# Altium PCB MainboardPCB.PcbDoc (part 2 of 2)
Units mm, origin at the board's own origin, x right, y up, seen from the top; angles counter-clockwise.
Board outline 134.24 x 134.24 mm, 2 copper layers (Top Layer, Bottom Layer); 101 components, 150 nets, 492 pads, 247 vias.
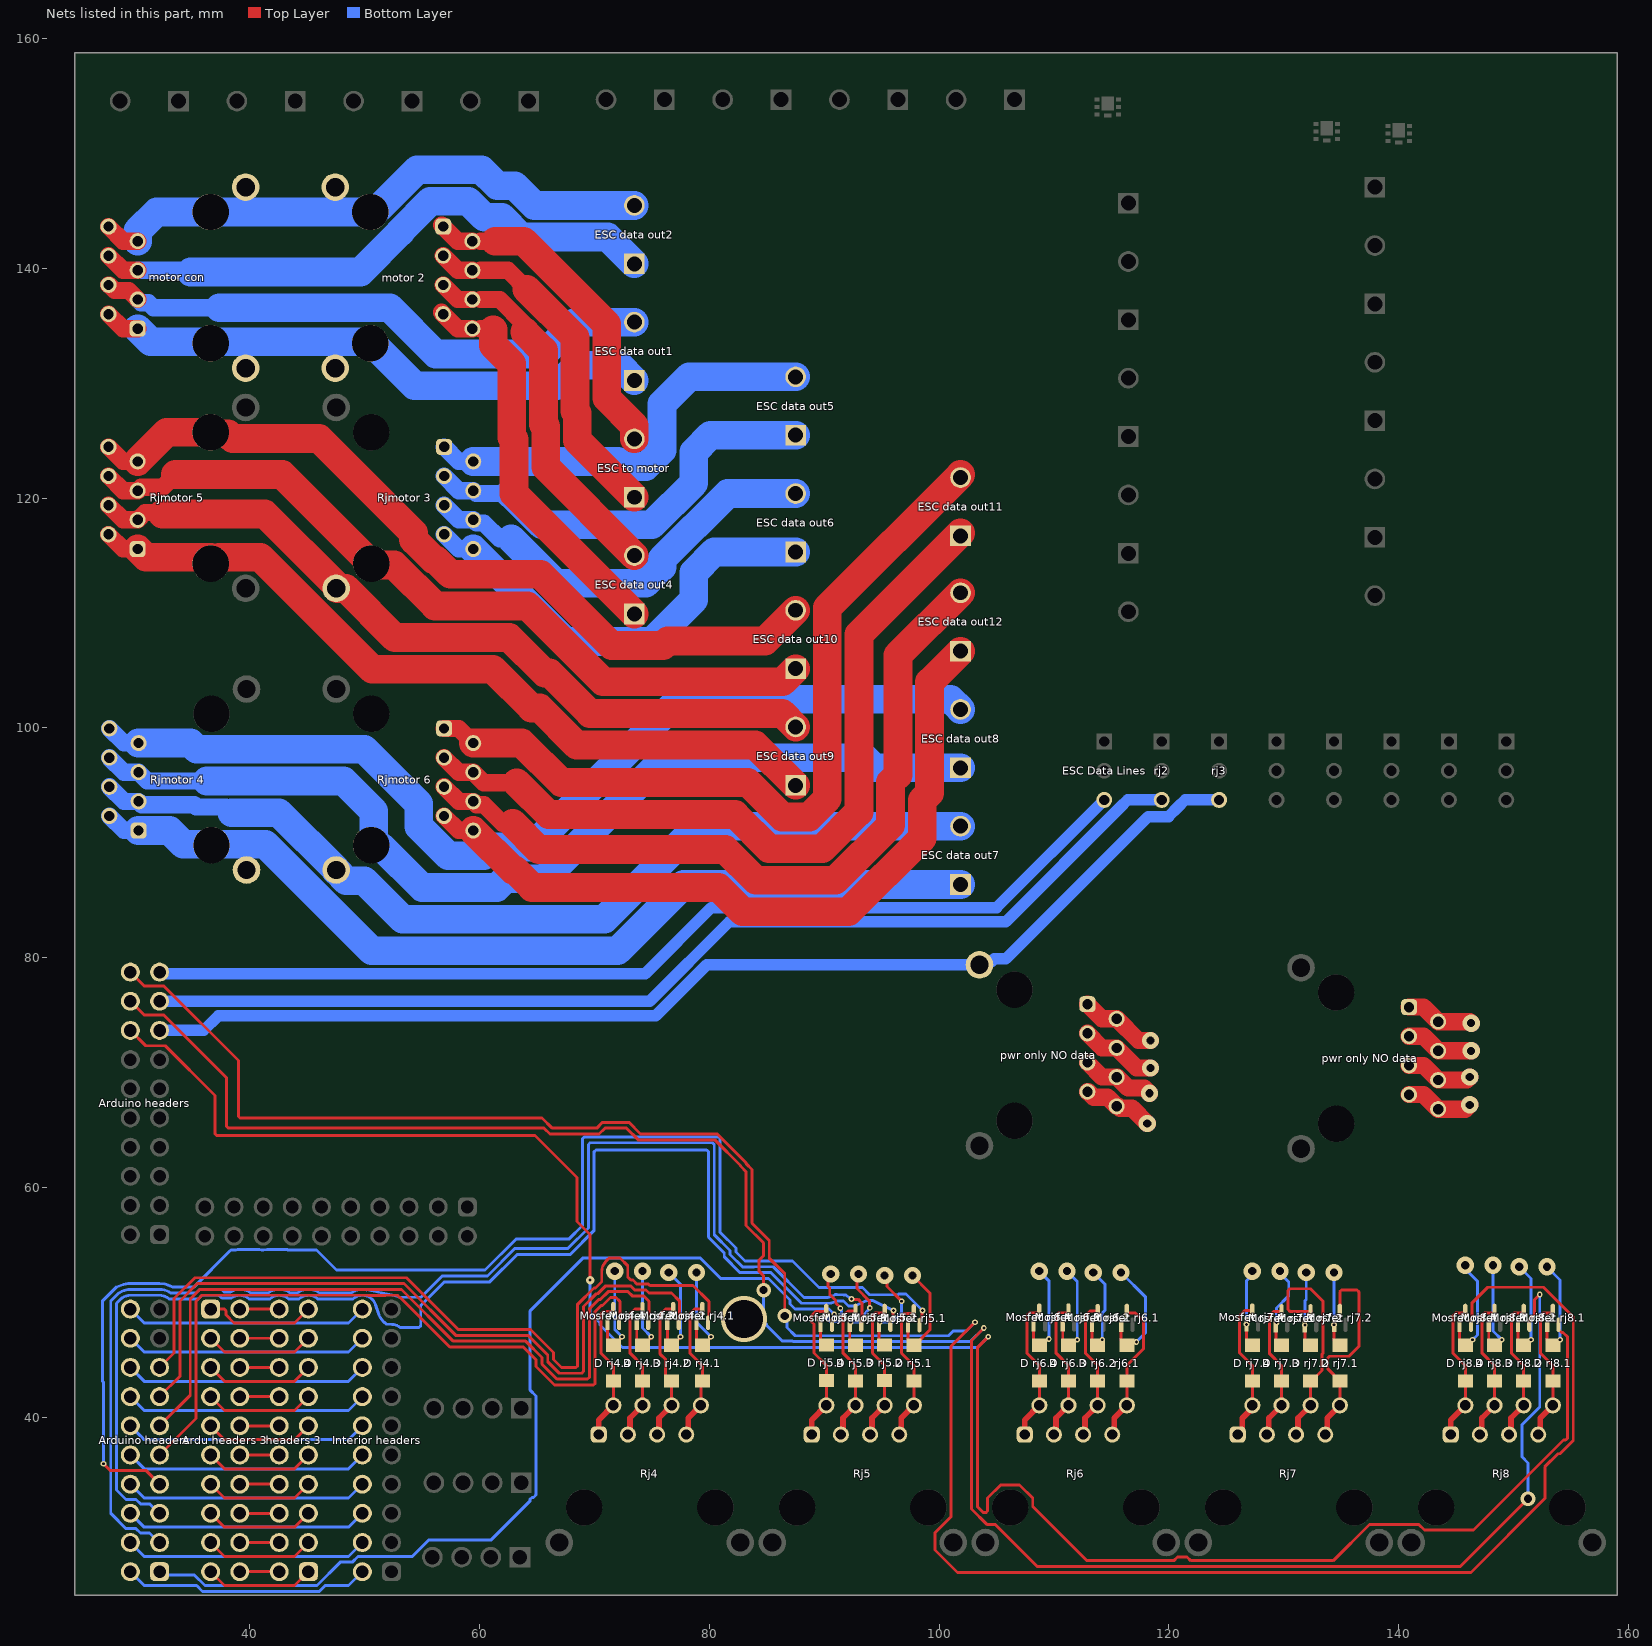
[diagram p2: the nets of this part, all layers, seen from the top]

## Via types
v1: diameter 1.5, hole 0.711, Top Layer to Bottom Layer, 143 vias
v2: diameter 1.27, hole 0.711, Top Layer to Bottom Layer, 42 vias
v3: diameter 0.5, hole 0.25, Top Layer to Bottom Layer, 41 vias
v4: diameter 0.75, hole 0.25, Top Layer to Bottom Layer, 8 vias
v5: diameter 1, hole 0, Top Layer to Bottom Layer, 5 vias
v6: diameter 4, hole 3.3, Top Layer to Bottom Layer, 4 vias
v7: diameter 1.27, hole 0, Top Layer to Bottom Layer, 3 vias
v8: diameter 0.75, hole 0.5, Top Layer to Bottom Layer, 1 vias

## Nets (pads, with @x,y where several pads share a name; then routed paths per layer and width w, separated by ;. In a path a pad name is that pad's centre, name@x,y a point inside that pad or via, vN(x,y) a via of type N, cw(c..) or ccw(c..) an arc to the next point about the centre after c; other vN are vias at no path point) (continued)
"NetArdu headers 1_15": "Arduino headers.15"@32.131,73.66 "pwr only NO data.Shell"@103.505,79.375 rj3.3 | length 100.6
  Bottom Layer w1: 32.131,73.66 35.964,73.66 37.25,74.946 75.322,74.946 79.751,79.375 103.505,79.375 103.773,79.643 104.551,79.643 104.791,79.883 105.791,79.883 118.185,92.277 119.965,92.277 120.813,93.126 120.813,93.14 121.399,93.726 rj3.3@124.365,93.726
"NetArdu headers 1_16": "Arduino headers.16"@29.591,73.66 "Mosfet rj8.1.2" | length 181.7
  Top Layer w0.254: 29.591,73.66 30.925,72.326 32.631,72.326 36.957,68 36.957,64.665 37.106,64.516 64.806,64.516 68.465,60.857 68.465,57.026 69.605,55.886 v4(69.605,51.921) ; v3(104.267,46.99) 103.314,46.037 103.314,32.212 103.848,31.678 104.058,31.678 104.207,31.827 104.207,32.947 105.359,34.099 106.987,34.099 108.139,32.947 108.139,32.229 112.866,27.502 120.418,27.502 120.737,27.821 121.578,27.821 121.899,27.5 134.293,27.5 137.455,30.662 141.751,30.662 142.248,30.165 146.497,30.165 154.345,38.013 154.533,38.013 154.682,38.162 154.682,46.997 154.312,47.367 154.182,47.367 153.916,47.633 153.916,48.04
  Bottom Layer w0.254: v4(69.605,51.921) 69.605,49.058 70.476,48.187 70.476,48.012 72.424,46.064 103.341,46.064 v3(104.267,46.99)
"NetArdu headers 1_17": "Arduino headers.17"@32.131,76.2 rj2.3 | length 94.5
  Bottom Layer w1: 32.131,76.2 74.803,76.2 81.705,83.102 105.789,83.102 115.814,93.126 115.814,93.14 116.399,93.726 rj2.3@119.365,93.726
"NetArdu headers 1_18": "Arduino headers.18"@29.591,76.2 "Mosfet rj8.2.2" | length 187.9
  Top Layer w0.254: 29.591,76.2 30.797,74.994 32.503,74.994 37.973,69.524 37.973,65.3 38.122,65.151 65.6,65.151 66.108,64.643 70.394,64.643 70.902,65.151 72.775,65.151 73.791,64.135 80.466,64.135 82.689,61.912 82.689,61.853 83.185,61.357 83.185,56.686 84.697,55.174 84.697,54.046 84.328,53.677 84.328,52.694 84.709,52.313 v2(84.709,51.054) ; v3(103.886,47.752) 102.806,46.672 102.806,32.001 104.143,30.664 104.862,30.664 108.532,26.994 121.687,26.994 121.689,26.992 145.356,26.992 v2(151.257,32.893) ; 151.376,48.04 151.376,48.481 151.813,48.918 151.813,50.213 v3(152.273,50.673)
  Bottom Layer w0.254: v2(84.709,51.054) 84.693,51.038 84.693,48.342 84.987,48.049 84.987,47.982 86.357,46.612 87.222,46.612 87.262,46.572 102.706,46.572 v3(103.886,47.752) ; v2(151.257,32.893) 151.257,36.013 150.749,36.521 150.749,39.365 152.273,40.889 v3(152.273,50.673)
  other v6: 82.996,48.535
"NetArdu headers 1_19": "Arduino headers.19"@32.131,78.74 "ESC Data Lines.3" | length 88.6
  Bottom Layer w1: 32.131,78.74 32.255,78.616 32.715,78.616 32.742,78.589 74.398,78.589 80.165,84.356 104.995,84.356 114.365,93.726
"NetArdu headers 1_20": "Arduino headers.20"@29.591,78.74 "Mosfet rj8.4.2" | length 203.8
  Top Layer w0.254: 29.591,78.74 30.797,77.534 32.503,77.534 38.989,71.048 38.989,66.189 39.138,66.04 65.429,66.04 66.318,65.151 70.184,65.151 70.692,65.659 72.985,65.659 74.001,64.643 80.677,64.643 83.197,62.123 83.197,62.063 83.705,61.555 83.705,56.884 85.205,55.384 85.205,53.836 86.55,52.491 v2(86.55,48.815) ; v3(103.124,48.26) 101.027,46.163 101.027,31.319 99.64,29.932 99.64,28.428 101.584,26.484 146.285,26.484 152.72,32.919 152.72,35.67 153.861,36.81 154.049,36.81 155.19,37.951 155.19,48.713 152.599,51.304 147.751,51.304 146.365,49.918 146.365,48.583 146.296,48.514 146.296,48.04
  Bottom Layer w0.254: v2(86.55,48.815) 86.745,48.621 86.745,47.808 87.473,47.08 100.801,47.08 101.219,47.498 102.362,47.498 v3(103.124,48.26)
"NetArdu headers 2_1": "Arduino headers.1"@32.131,26.543 "Mosfet rj5.4.2" | length 84.5
  Top Layer w0.254: 90.67,48.04 90.67,48.514 90.815,48.659 90.815,48.891 v3(90.862,48.939)
  Bottom Layer w0.254: 32.131,26.543 32.416,26.258 35.156,26.258 36.076,25.337 45.826,25.337 47.858,27.369 48.904,27.369 49.412,27.877 54.132,27.877 55.54,29.285 60.96,29.285 64.389,32.713 64.389,32.86 64.538,33.009 64.685,33.009 64.908,33.232 64.908,41.825 64.389,42.344 64.389,49.254 68.971,53.836 79.208,53.836 80.978,52.066 84.284,52.066 84.288,52.07 85.13,52.07 87.017,50.183 87.017,49.841 87.455,49.403 90.397,49.403 v3(90.862,48.939)
"NetArdu headers 2_2": "Arduino headers.2"@29.591,26.543 "Interior headers.2" | length 21.6
  Bottom Layer w0.254: 29.591,26.543 30.797,25.337 35.358,25.337 35.866,24.829 46.037,24.829 46.545,25.337 48.578,25.337 49.784,26.543
"NetArdu headers 2_3": "Arduino headers.3"@32.131,29.083 "Mosfet rj5.3.2" | length 112.8
  Top Layer w0.254: v3(92.361,50.29) 92.4,50.251 92.946,50.251 93.279,49.918 93.279,48.583 93.21,48.514 93.21,48.04
  Bottom Layer w0.254: 32.131,29.083 32.077,29.083 31.251,29.909 30.471,29.909 30.091,30.289 29.219,30.289 27.877,31.631 27.877,50.113 28.526,50.762 28.705,50.87 cw(c29.591,49.403) 29.591,51.117 32.131,51.117 cw(c32.131,49.403) 33.124,50.8 35.307,50.8 35.624,51.117 37.528,51.117 37.758,50.887 38.258,50.887 cw(c39.116,49.403) 40.109,50.8 41.552,50.8 cw(c42.545,49.403) 43.538,50.8 44.092,50.8 cw(c45.085,49.403) 46.078,50.8 48.791,50.8 cw(c49.784,49.403) 50.127,51.082 52.565,50.585 cw(c52.324,49.403) 52.748,50.532 53.017,50.431 54.876,50.431 56.73,52.285 60.666,52.285 63.076,54.695 67.681,54.695 69.457,56.471 69.457,63.732 69.606,63.881 80.266,63.881 80.415,63.732 80.415,55.876 81.792,54.499 81.792,54.161 82.871,53.082 83.863,53.082 83.867,53.086 85.551,53.086 88.218,50.419 90.316,50.419 90.413,50.438 90.942,50.657 91.097,50.657 91.657,50.624 91.866,50.611 v3(92.361,50.29)
"NetArdu headers 2_4": "Arduino headers.4"@29.591,29.083 "Interior headers.4" | length 21.2
  Bottom Layer w0.254: 29.591,29.083 30.797,27.877 48.578,27.877 49.784,29.083
"NetArdu headers 2_5": "Arduino headers.5"@32.131,31.623 "Mosfet rj5.2.2" | length 114.4
  Top Layer w0.254: 95.75,48.04 95.75,48.514 95.965,48.729 95.965,49.229 v3(96.012,49.276)
  Bottom Layer w0.254: 32.131,31.623 32.077,31.623 31.251,32.449 30.471,32.449 30.091,32.829 29.219,32.829 28.385,33.663 28.385,49.797 28.385,49.903 28.737,50.254 cw(c29.591,49.403) 29.591,50.609 32.131,50.609 cw(c32.131,49.403) 32.946,50.292 35.518,50.292 35.835,50.609 37.317,50.609 37.547,50.379 38.258,50.379 38.407,50.379 cw(c39.116,49.403) 39.931,50.292 41.73,50.292 cw(c42.545,49.403) 43.36,50.292 44.27,50.292 cw(c45.085,49.403) 45.835,50.347 cw(c45.085,49.403) 45.9,50.292 48.791,50.292 48.969,50.292 cw(c49.784,49.403) 50.929,49.781 51.179,49.025 ccw(c52.895,49.592) 51.899,48.083 52.362,48.068 cw(c52.324,46.863) 53.079,47.804 54.72,47.804 54.869,47.952 54.869,49.705 56.94,51.777 60.876,51.777 63.241,54.142 67.846,54.142 69.965,56.261 69.965,63.097 70.114,63.246 79.758,63.246 79.907,63.097 79.907,55.665 81.284,54.289 81.284,53.951 82.661,52.574 84.074,52.574 84.078,52.578 85.34,52.578 88.007,49.911 90.493,49.911 90.533,49.914 90.593,49.924 91.094,50.09 91.133,50.103 91.656,50.103 92.1,49.659 92.623,49.659 93.701,50.143 94.224,50.143 v3(96.012,49.276)
"NetArdu headers 2_6": "Arduino headers.6"@29.591,31.623 "Interior headers.6" | length 21.2
  Bottom Layer w0.254: 29.591,31.623 30.797,30.417 48.578,30.417 49.784,31.623
"NetArdu headers 2_7": "Arduino headers.7"@32.131,34.163 "Mosfet rj5.1.2" | length 115.8
  Top Layer w0.254: v3(27.246,35.941) 27.818,35.369 30.925,35.369 32.131,34.163 ; 98.282,48.006 98.282,48.48 98.505,48.703 98.505,49.229 v3(98.552,49.276)
  Bottom Layer w0.254: v3(27.246,35.941) 27.246,43.036 27.178,43.104 27.178,50.132 28.354,51.308 28.794,51.477 cw(c29.591,49.403) 29.591,51.625 32.131,51.625 cw(c32.131,49.403) 33.275,51.308 35.097,51.308 38.27,54.481 38.336,54.547 38.608,54.547 ccw(c38.608,55.753) 38.939,54.593 40.817,54.593 ccw(c41.148,55.753) 41.385,54.571 41.499,54.593 43.151,54.593 43.248,54.593 43.289,54.553 43.67,54.547 ccw(c43.688,55.753) 43.805,54.553 45.782,54.553 47.542,52.793 60.456,52.793 63.149,55.487 67.754,55.487 68.949,56.682 68.949,64.24 69.098,64.389 80.774,64.389 80.923,64.24 80.923,56.086 82.3,54.709 82.3,54.372 83.082,53.59 83.653,53.59 83.657,53.594 87.231,53.594 89.543,51.283 93.313,51.283 93.938,50.657 94.883,50.651 96.405,50.651 96.471,50.717 97.111,50.717 v3(98.552,49.276)
"NetArdu headers 2_8": "Arduino headers.8"@29.591,34.163 "Interior headers.8" | length 21.2
  Bottom Layer w0.254: 29.591,34.163 30.797,32.957 48.578,32.957 49.784,34.163
"NetArdu headers 2_9": "Arduino headers.9"@32.131,36.703 "Mosfet rj4.4.2" | length 64.3
  Top Layer w0.254: 32.131,36.703 35.306,39.878 35.306,50.08 35.835,50.609 50.284,50.609 50.299,50.593 51.809,50.593 51.824,50.609 52.824,50.609 53.014,50.419 53.078,50.419 57.396,46.101 63.792,46.101 64.903,44.99 64.903,44.395 66.499,42.799 69.902,42.799 70.051,42.948 70.051,49.199 70.572,49.719 70.699,49.719 71.392,50.413 71.864,50.413 72.197,50.079 72.197,48.744 72.128,48.676 72.128,48.202
"NetArdu headers 2_10": "Arduino headers.10"@29.591,36.703 "Interior headers.10" | length 21.2
  Bottom Layer w0.254: 29.591,36.703 30.797,35.497 48.578,35.497 49.784,36.703
"NetArdu headers 2_11": "Arduino headers.11"@32.131,39.243 "Mosfet rj4.3.2" | length 64.9
  Top Layer w0.254: 32.131,39.243 34.798,41.91 34.798,50.291 35.624,51.117 50.495,51.117 50.511,51.101 51.598,51.101 51.614,51.117 53.194,51.117 57.702,46.609 64.002,46.609 65.411,45.2 65.411,44.605 66.709,43.307 69.394,43.307 69.543,43.456 69.543,49.409 70.361,50.227 70.489,50.227 71.182,50.921 72.916,50.921 73.279,50.558 74.258,50.558 74.737,50.079 74.737,48.744 74.668,48.676 74.668,48.202
"NetArdu headers 2_12": "Arduino headers.12"@29.591,39.243 "Interior headers.12" | length 21.2
  Bottom Layer w0.254: 29.591,39.243 30.797,38.037 48.578,38.037 49.784,39.243
"NetArdu headers 2_13": "Arduino headers.13"@32.131,41.783 "Mosfet rj4.2.2" | length 65.7
  Top Layer w0.254: 32.131,41.783 33.906,43.558 33.906,50.117 35.414,51.625 53.404,51.625 57.912,47.117 64.213,47.117 65.919,45.411 65.919,44.815 66.919,43.815 68.886,43.815 69.035,43.964 69.035,49.62 70.151,50.735 70.278,50.735 70.972,51.429 73.127,51.429 73.489,51.066 74.469,51.066 74.735,50.8 76.683,50.8 77.404,50.079 77.404,48.744 77.335,48.676 77.335,48.202
"NetArdu headers 2_14": "Arduino headers.14"@29.591,41.783 "Interior headers.14" | length 21.2
  Bottom Layer w0.254: 29.591,41.783 30.797,40.577 48.578,40.577 49.784,41.783
"NetArdu headers 2_15": "Arduino headers.15"@32.131,44.323 "Mosfet rj4.1.2" | length 69.3
  Top Layer w0.254: 32.131,44.323 33.398,45.59 33.398,50.327 35.204,52.133 53.614,52.133 58.122,47.625 64.423,47.625 66.427,45.621 66.427,45.026 67.13,44.323 68.378,44.323 68.527,44.472 68.527,49.83 69.941,51.243 70.068,51.243 70.55,51.725 70.624,51.799 70.624,52.705 cw(c71.755,52.705) 70.866,53.404 71.098,53.699 71.247,53.848 72.211,53.848 72.886,53.173 72.886,52.203 73.152,51.937 73.337,51.937 73.7,51.574 74.679,51.574 74.806,51.447 78.576,51.447 79.944,50.079 79.944,48.744 79.875,48.676 79.875,48.202
"NetArdu headers 2_16": "Arduino headers.16"@29.591,44.323 "Interior headers.16" | length 21.2
  Bottom Layer w0.254: 29.591,44.323 30.797,43.117 48.578,43.117 49.784,44.323
"NetArdu headers 2_18": "Arduino headers.18"@29.591,46.863 "Interior headers.18" | length 21.2
  Bottom Layer w0.254: 29.591,46.863 30.797,45.657 48.578,45.657 49.784,46.863
"NetArdu headers 2_20": "Arduino headers.20"@29.591,49.403 "Interior headers.20" | length 21.2
  Bottom Layer w0.254: 29.591,49.403 30.797,48.197 48.578,48.197 49.784,49.403
"NetArdu headers 3_1": "Ardu headers 3.1" "headers 3.19" | length 9.7
  Top Layer w0.254: 36.576,49.403 37.761,49.403 37.91,49.254 37.91,48.903 38.616,48.197 43.879,48.197 45.085,49.403
"NetArdu headers 3_2": "Ardu headers 3.2" "headers 3.20" | length 3.4
  Top Layer w0.254: 39.116,49.403 42.545,49.403
"NetArdu headers 3_3": "Ardu headers 3.3" "headers 3.17" | length 9.5
  Top Layer w0.254: 36.576,46.863 37.782,45.657 43.879,45.657 45.085,46.863
"NetArdu headers 3_4": "Ardu headers 3.4" "headers 3.18" | length 3.4
  Top Layer w0.254: 39.116,46.863 42.545,46.863
"NetArdu headers 3_5": "Ardu headers 3.5" "headers 3.15" | length 9.5
  Top Layer w0.254: 36.576,44.323 37.782,43.117 43.879,43.117 45.085,44.323
"NetArdu headers 3_6": "Ardu headers 3.6" "headers 3.16" | length 3.4
  Top Layer w0.254: 39.116,44.323 42.545,44.323
"NetArdu headers 3_7": "Ardu headers 3.7" "headers 3.13" | length 9.5
  Top Layer w0.254: 36.576,41.783 37.782,40.577 43.879,40.577 45.085,41.783
"NetArdu headers 3_8": "Ardu headers 3.8" "headers 3.14" | length 3.4
  Top Layer w0.254: 39.116,41.783 42.545,41.783
"NetArdu headers 3_9": "Ardu headers 3.9" "headers 3.11" | length 9.5
  Top Layer w0.254: 36.576,39.243 37.782,38.037 43.879,38.037 45.085,39.243
"NetArdu headers 3_10": "Ardu headers 3.10" "headers 3.12" | length 3.4
  Top Layer w0.254: 39.116,39.243 42.545,39.243
"NetArdu headers 3_11": "Ardu headers 3.11" "headers 3.9" | length 9.5
  Top Layer w0.254: 36.576,36.703 37.782,35.497 43.879,35.497 45.085,36.703
"NetArdu headers 3_12": "Ardu headers 3.12" "headers 3.10" | length 3.4
  Top Layer w0.254: 39.116,36.703 42.545,36.703
"NetArdu headers 3_13": "Ardu headers 3.13" "headers 3.7" | length 9.5
  Top Layer w0.254: 36.576,34.163 37.782,32.957 43.879,32.957 45.085,34.163
"NetArdu headers 3_14": "Ardu headers 3.14" "headers 3.8" | length 3.4
  Top Layer w0.254: 39.116,34.163 42.545,34.163
"NetArdu headers 3_15": "Ardu headers 3.15" "headers 3.5" | length 9.5
  Top Layer w0.254: 36.576,31.623 37.782,30.417 43.879,30.417 45.085,31.623
"NetArdu headers 3_16": "Ardu headers 3.16" "headers 3.6" | length 3.4
  Top Layer w0.254: 39.116,31.623 42.545,31.623
"NetArdu headers 3_17": "Ardu headers 3.17" "headers 3.3" | length 9.5
  Top Layer w0.254: 36.576,29.083 37.782,27.877 43.879,27.877 45.085,29.083
"NetArdu headers 3_18": "Ardu headers 3.18" "headers 3.4" | length 3.4
  Top Layer w0.254: 39.116,29.083 42.545,29.083
"NetArdu headers 3_19": "Ardu headers 3.19" "headers 3.1" | length 9.5
  Top Layer w0.254: 36.576,26.543 37.782,25.337 43.879,25.337 45.085,26.543
"NetArdu headers 3_20": "Ardu headers 3.20" "headers 3.2" | length 3.4
  Top Layer w0.254: 39.116,26.543 42.545,26.543
"NetD rj4.1_1": "D rj4.1.1" "Mosfet rj4.1.3" Rj4.7 Rj4.8 | length 12.8
  Top Layer w0.254: Rj4.8@79.249,41.023 79.249,43.028 79.375,43.154 79.375,44.49 78.306,45.559 78.306,48.988 78.721,49.403 79.375,49.403
  Top Layer w0.5: Rj4.7@77.979,38.483 78.151,38.655 78.151,39.925 Rj4.8@79.249,41.023
"NetD rj4.1_2": "D rj4.1.2" "Mosfet rj4.1.1" | length 9.4
  Top Layer w0.254: 78.875,48.202 78.875,46.702 79.323,46.254 79.375,46.254 79.45,46.254 80.137,46.941 v3(80.137,46.99)
  Bottom Layer w0.254: v1(78.867,52.578) 78.867,48.26 v3(80.137,46.99)
"NetD rj4.2_1": "D rj4.2.1" "Mosfet rj4.2.3" Rj4.5 Rj4.6 | length 12.8
  Top Layer w0.254: Rj4.6@76.709,41.023 76.709,43.153 76.708,43.154 76.633,43.154 76.185,43.602 76.185,45.013 75.677,45.521 75.677,48.899 76.181,49.403 76.835,49.403
  Top Layer w0.5: Rj4.5@75.439,38.483 75.611,38.655 75.611,39.925 Rj4.6@76.709,41.023
"NetD rj4.2_2": "D rj4.2.2" "Mosfet rj4.2.1" | length 9.2
  Top Layer w0.254: 76.335,48.202 76.335,46.627 76.708,46.254 76.783,46.254 77.47,46.941 v3(77.47,46.99)
  Bottom Layer w0.254: v1(76.454,52.578) 77.47,51.562 v3(77.47,46.99)
"NetD rj4.3_1": "D rj4.3.1" "Mosfet rj4.3.3" Rj4.3 Rj4.4 | length 12.7
  Top Layer w0.254: 74.168,49.403 73.514,49.403 73.099,48.988 73.099,45.559 74.168,44.49 74.168,43.154 74.169,43.153 Rj4.4@74.169,41.023
  Top Layer w0.5: Rj4.3@72.899,38.483 73.071,38.655 73.071,39.925 Rj4.4@74.169,41.023
"NetD rj4.3_2": "D rj4.3.2" "Mosfet rj4.3.1" | length 9.3
  Top Layer w0.254: 73.668,48.202 73.668,46.702 74.116,46.254 74.168,46.254 74.243,46.254 74.93,46.941 v3(74.93,46.99)
  Bottom Layer w0.254: v1(74.168,52.705) 74.168,47.752 v3(74.93,46.99)
"NetD rj4.4_1": "D rj4.4.1" "Mosfet rj4.4.3" Rj4.1 Rj4.2 | length 12.8
  Top Layer w0.254: 71.628,49.403 71.628,49.268 71.572,49.211 70.782,49.211 70.559,48.988 70.559,45.559 71.628,44.49 71.628,43.154 71.629,43.153 Rj4.2@71.629,41.023
  Top Layer w0.5: Rj4.1@70.359,38.483 70.359,39.753 Rj4.2@71.629,41.023
"NetD rj4.4_2": "D rj4.4.2" "Mosfet rj4.4.1" | length 9.3
  Top Layer w0.254: 71.128,48.202 71.128,46.702 71.576,46.254 71.628,46.254 71.703,46.254 72.39,46.941 v3(72.39,46.99)
  Bottom Layer w0.254: v1(71.755,52.705) 71.755,47.625 v3(72.39,46.99)
"NetD rj5.1_1": "D rj5.1.1" "Mosfet rj5.1.3" Rj5.7 Rj5.8 | length 12.6
  Top Layer w0.254: 97.782,49.207 97.782,49.072 97.726,49.016 96.936,49.016 96.713,48.792 96.713,45.567 97.791,44.489 Rj5.8@97.791,41.023
  Top Layer w0.5: Rj5.7@96.521,38.483 96.693,38.655 96.693,39.925 Rj5.8@97.791,41.023
"NetD rj5.1_2": "D rj5.1.2" "Mosfet rj5.1.1" | length 9.3
  Top Layer w0.254: 97.282,48.006 97.282,46.702 97.73,46.254 97.79,46.254 97.865,46.254 99.183,47.572 99.183,50.804 v1(97.663,52.324)
"NetD rj5.2_1": "D rj5.2.1" "Mosfet rj5.2.3" Rj5.5 Rj5.6 | length 12.6
  Top Layer w0.254: 95.25,49.242 95.25,49.106 95.194,49.05 94.404,49.05 94.181,48.827 94.181,47.254 94.2,47.235 94.2,45.566 95.25,44.516 95.25,43.18 95.251,43.179 Rj5.6@95.251,41.023
  Top Layer w0.5: Rj5.5@93.981,38.483 94.153,38.655 94.153,39.925 Rj5.6@95.251,41.023
"NetD rj5.2_2": "D rj5.2.2" "Mosfet rj5.2.1" | length 8.3
  Top Layer w0.254: v3(94.82,48.259) 94.75,48.189 94.75,47.78 94.75,47.748 94.75,46.728 95.198,46.28 ; v1(95.25,52.324) 95.444,52.13 95.444,51.373 v3(96.732,50.086)
  Bottom Layer w0.254: v3(94.82,48.259) 95.887,48.259 96.732,49.104 v3(96.732,50.086)
"NetD rj5.3_1": "D rj5.3.1" "Mosfet rj5.3.3" Rj5.3 Rj5.4 | length 12.6
  Top Layer w0.254: 92.71,49.242 92.056,49.242 91.865,49.05 91.641,48.827 91.641,45.559 92.71,44.49 92.71,43.154 92.711,43.153 Rj5.4@92.711,41.023
  Top Layer w0.5: Rj5.3@91.441,38.483 91.613,38.655 91.613,39.925 Rj5.4@92.711,41.023
"NetD rj5.3_2": "D rj5.3.2" "Mosfet rj5.3.1" | length 8
  Top Layer w0.254: v3(92.28,48.259) 92.21,48.189 92.21,47.78 92.21,46.702 92.658,46.254 ; v1(92.964,52.451) 92.837,52.324 92.837,51.189 93.915,50.111 93.915,49.559 v3(93.962,49.512)
  Bottom Layer w0.254: v3(92.28,48.259) 92.285,48.264 92.911,48.264 93.472,48.826 93.472,48.917 93.53,48.987 v3(93.962,49.512)
"NetD rj5.4_1": "D rj5.4.1" "Mosfet rj5.4.3" Rj5.1 Rj5.2 | length 12.9
  Top Layer w0.254: 90.17,49.242 90.157,49.242 90.114,49.198 89.257,49.198 88.888,48.829 88.888,48.306 89.101,48.092 89.101,45.585 90.17,44.516 90.17,43.18 90.171,43.179 Rj5.2@90.171,41.023
  Top Layer w0.5: Rj5.1@88.901,38.483 88.901,39.753 Rj5.2@90.171,41.023
"NetD rj5.4_2": "D rj5.4.2" "Mosfet rj5.4.1" | length 9.3
  Top Layer w0.254: v3(89.519,48.567) 89.589,48.497 89.609,48.497 89.609,48.101 89.67,48.04 89.67,47.78 89.67,47.748 89.67,46.728 90.118,46.28 90.17,46.28 ; v1(90.551,52.451) 90.313,52.213 90.313,51.367 90.472,51.208 90.472,50.665 90.994,50.144 90.994,49.94 91.394,49.539 v3(91.394,49.472)
  Bottom Layer w0.254: v3(89.519,48.567) 90.293,48.567 90.553,48.308 91.26,48.308 91.469,48.516 91.542,48.589 91.542,48.722 91.493,49.2 v3(91.394,49.472)
"NetD rj6.2_1": "D rj6.2.1" "Mosfet rj6.2.3" Rj6.5 Rj6.6 | length 12.5
  Top Layer w0.254: Rj6.6@113.793,41.023 113.793,43.153 113.792,43.154 113.792,44.49 112.724,45.558 112.724,48.814 113.139,49.229 113.793,49.229
  Top Layer w0.5: Rj6.5@112.523,38.483 112.695,38.655 112.695,39.925 Rj6.6@113.793,41.023
"NetD rj6.2_2": "D rj6.2.2" "Mosfet rj6.2.1" | length 8.4
  Top Layer w0.254: 113.293,48.028 113.293,46.702 113.741,46.254 113.792,46.254
  Bottom Layer w0.254: v1(113.411,52.578) 114.427,51.562 114.427,49.3 114.192,49.065 v3(114.192,46.736)
"NetD rj6.3_1": "D rj6.3.1" "Mosfet rj6.3.3" Rj6.3 Rj6.4 | length 12.7
  Top Layer w0.254: 111.252,49.276 111.252,49.141 111.196,49.084 110.406,49.084 110.183,48.861 110.183,45.559 111.252,44.49 111.252,43.154 111.253,43.153 Rj6.4@111.253,41.023
  Top Layer w0.5: Rj6.3@109.983,38.483 110.155,38.655 110.155,39.925 Rj6.4@111.253,41.023
"NetD rj6.3_2": "D rj6.3.2" "Mosfet rj6.3.1" | length 8.4
  Top Layer w0.254: 110.752,48.075 110.752,46.702 111.2,46.254 111.252,46.254
  Bottom Layer w0.254: v1(111.125,52.705) 112.014,51.816 v3(112.014,46.736)
"NetD rj6.4_1": "D rj6.4.1" "Mosfet rj6.4.3" Rj6.1 Rj6.2 | length 12.7
  Top Layer w0.254: 108.712,49.276 108.712,49.141 108.656,49.084 107.866,49.084 107.643,48.861 107.643,45.559 108.712,44.49 108.712,43.154 108.713,43.153 Rj6.2@108.713,41.023
  Top Layer w0.5: Rj6.1@107.443,38.483 107.443,39.753 Rj6.2@108.713,41.023
"NetD rj6.4_2": "D rj6.4.2" "Mosfet rj6.4.1" | length 8.3
  Top Layer w0.254: 108.212,48.075 108.212,46.702 108.66,46.254 108.712,46.254
  Bottom Layer w0.254: v1(108.712,52.705) 109.541,51.876 v3(109.541,46.803)
"NetD rj7.1_1": "D rj7.1.1" "Mosfet rj7.2.3"@134.874,49.242 Rj7.7 Rj7.8 | length 18.9
  Top Layer w0.254: Rj7.8@134.874,41.021 134.874,43.154 133.824,44.204 133.824,45.149 133.973,45.298 135.682,45.298 136.525,46.141 136.525,50.905 136.376,51.054 135.023,51.054 134.874,50.905 134.874,49.242
  Top Layer w0.5: Rj7.7@133.604,38.481 133.776,38.653 133.776,39.923 Rj7.8@134.874,41.021
"NetD rj7.1_2": "D rj7.1.2" "Mosfet rj7.2.1"@134.374,48.04 | length 6.6
  Top Layer w0.254: v3(134.374,48.04) 134.374,46.702 134.822,46.254 134.874,46.254
  Bottom Layer w0.254: v1(134.366,52.578) 134.37,52.574 134.37,48.044 v3(134.374,48.04)
"NetD rj7.2_1": "D rj7.2.1" "Mosfet rj7.2.3"@132.326,49.207 Rj7.5 Rj7.6 | length 19.9
  Top Layer w0.254: Rj7.6@132.334,41.021 132.334,43.154 132.409,43.154 133.316,44.061 133.316,45.472 133.403,45.559 133.403,50.094 132.326,51.171 130.52,51.171 130.371,51.022 130.371,49.356 130.52,49.207 132.387,49.207
  Top Layer w0.5: Rj7.5@131.064,38.481 131.236,38.653 131.236,39.923 Rj7.6@132.334,41.021
"NetD rj7.2_2": "D rj7.2.2" "Mosfet rj7.2.1"@131.826,48.006 | length 6.6
  Top Layer w0.254: v3(131.826,48.006) 131.826,46.702 132.274,46.254 132.334,46.254
  Bottom Layer w0.254: v3(131.826,48.006) 131.826,50.1 131.953,50.227 v1(131.953,52.578)
"NetD rj7.3_1": "D rj7.3.1" "Mosfet rj7.3.3" Rj7.3 Rj7.4 | length 12.5
  Top Layer w0.254: Rj7.4@129.794,41.021 129.794,43.154 129.794,44.49 128.733,45.551 128.733,48.792 129.148,49.207 129.802,49.207
  Top Layer w0.5: Rj7.3@128.524,38.481 128.696,38.653 128.696,39.923 Rj7.4@129.794,41.021
"NetD rj7.3_2": "D rj7.3.2" "Mosfet rj7.3.1" | length 7.2
  Top Layer w0.254: v3@129.302,48.006 129.302,46.702 129.75,46.254 129.794,46.254
  Bottom Layer w0.254: v3(129.364,48.231) 129.364,49.503 130.429,50.568 130.429,51.773 129.667,52.535 v1(129.667,52.705)
"NetD rj7.4_1": "D rj7.4.1" "Mosfet rj7.4.3" Rj7.1 Rj7.2 | length 12.6
  Top Layer w0.254: Rj7.2@127.254,41.021 127.254,43.154 127.254,44.49 126.123,45.621 126.123,48.799 126.6,49.276 127.254,49.276
  Top Layer w0.5: Rj7.1@125.984,38.481 126.372,38.869 126.372,39.896 127.254,40.777 Rj7.2@127.254,41.021
"NetD rj7.4_2": "D rj7.4.2" "Mosfet rj7.4.1" | length 6.9
  Top Layer w0.254: v3(126.754,48.075) 126.754,46.702 127.202,46.254 127.254,46.254
  Bottom Layer w0.254: v3(126.754,48.075) 126.754,51.868 127.254,52.368 v1(127.254,52.705)
"NetD rj8.1_1": "D rj8.1.1" "Mosfet rj8.1.3" Rj8.7 Rj8.8 | length 12.6
  Top Layer w0.254: Rj8.8@153.416,41.021 153.416,43.154 153.416,44.49 152.347,45.559 152.347,48.827 152.57,49.05 153.36,49.05 153.416,49.106 153.416,49.242
  Top Layer w0.5: Rj8.7@152.146,38.481 152.318,38.653 152.318,39.923 Rj8.8@153.416,41.021
"NetD rj8.1_2": "D rj8.1.2" "Mosfet rj8.1.1" | length 8.8
  Top Layer w0.254: 152.916,48.04 152.916,46.702 153.364,46.254 153.416,46.254
  Bottom Layer w0.254: v1(152.908,53.086) 154.051,51.943 v3(154.051,46.736)
"NetD rj8.2_1": "D rj8.2.1" "Mosfet rj8.2.3" Rj8.5 Rj8.6 | length 12.6
  Top Layer w0.254: Rj8.6@150.876,41.021 150.876,43.154 150.876,44.49 149.807,45.559 149.807,48.827 150.03,49.05 150.82,49.05 150.876,49.106 150.876,49.242
  Top Layer w0.5: Rj8.5@149.606,38.481 149.778,38.653 149.778,39.923 Rj8.6@150.876,41.021
"NetD rj8.2_2": "D rj8.2.2" "Mosfet rj8.2.1" | length 8.8
  Top Layer w0.254: 150.376,48.04 150.376,46.702 150.824,46.254 150.876,46.254
  Bottom Layer w0.254: v1(150.495,53.086) 151.511,52.07 v3(151.511,46.736)
"NetD rj8.3_1": "D rj8.3.1" "Mosfet rj8.3.3" Rj8.3 Rj8.4 | length 12.6
  Top Layer w0.254: Rj8.4@148.336,41.021 148.336,43.154 148.336,44.49 147.267,45.559 147.267,48.827 147.49,49.05 148.28,49.05 148.336,49.106 148.336,49.242
  Top Layer w0.5: Rj8.3@147.066,38.481 147.238,38.653 147.238,39.923 Rj8.4@148.336,41.021
"NetD rj8.3_2": "D rj8.3.2" "Mosfet rj8.3.1" | length 8.8
  Top Layer w0.254: 147.836,48.04 147.836,46.702 148.284,46.254 148.336,46.254
  Bottom Layer w0.254: v1(148.209,53.213) 148.209,47.498 v3(148.971,46.736)
"NetD rj8.4_1": "D rj8.4.1" "Mosfet rj8.4.3" Rj8.1 Rj8.2 | length 12.6
  Top Layer w0.254: Rj8.2@145.796,41.021 145.796,43.154 145.796,44.49 144.727,45.559 144.727,48.827 144.95,49.05 145.74,49.05 145.796,49.106 145.796,49.242
  Top Layer w0.5: Rj8.1@144.526,38.481 144.526,39.751 Rj8.2@145.796,41.021
"NetD rj8.4_2": "D rj8.4.2" "Mosfet rj8.4.1" | length 9.1
  Top Layer w0.254: 145.296,48.04 145.296,46.702 145.744,46.254 145.796,46.254
  Bottom Layer w0.254: v1(145.796,53.213) 145.796,52.884 146.846,51.834 146.846,47.151 v3(146.431,46.736)
"NetESC data out1_1": "ESC data out1.1" "motor 2.M2" "motor 2.Shell"@47.422,131.317 "motor con.1" "motor con.2" "motor con.M1" "motor con.Shell"@39.626,131.317 | length 49.8
  Top Layer w1.5: 27.686,136.017 28.956,134.747 30.226,134.747
  Bottom Layer w2.5: 30.226,134.747 31.368,133.605 36.448,133.605 36.576,133.477 36.704,133.605 50.469,133.605 50.472,133.602 50.516,133.602 54.329,129.789 66.698,129.789 68.481,131.572 72.126,131.572 73.461,130.237
"NetESC data out1_2": "ESC data out1.2" "motor con.3" "motor con.4" | length 49.4
  Top Layer w1.5: 27.686,138.557 27.745,138.557 28.229,138.073 29.44,138.073 30.226,137.287
  Bottom Layer w1.5: 30.226,137.287 30.512,137.001 31.16,137.001 31.595,136.566 37.338,136.566
  Bottom Layer w2.5: 37.338,136.566 52.156,136.566 56.179,132.543 65.557,132.543 68.331,135.317 73.461,135.317
"NetESC data out2_1": "ESC data out2.1" "motor con.5" "motor con.6" | length 51.2
  Top Layer w1.5: 27.686,141.097 28.956,139.827 30.226,139.827
  Bottom Layer w1.5: 30.226,139.827 34.716,139.827 34.851,139.692
  Bottom Layer w2.5: 34.851,139.692 49.626,139.692 53.103,143.169 53.103,143.239 55.704,145.841 59.005,145.841 60.407,144.439 61.908,144.439 63.624,142.723 71.135,142.723 73.461,140.397
"NetESC data out2_2": "ESC data out2.2" "motor 2.M1" "motor 2.Shell"@47.422,147.067 "motor con.7" "motor con.8" "motor con.M2" "motor con.Shell"@39.626,147.067 | length 50.6
  Top Layer w1.5: 27.686,143.637 28.956,142.367 30.226,142.367
  Bottom Layer w2.5: 30.226,142.367 30.226,143.256 31.877,144.907 36.576,144.907 ; 36.395,144.907 50.472,144.907 ; 50.699,144.953 50.988,145.242 51.21,145.242 54.563,148.595 60.146,148.595 61.548,147.193 63.048,147.193 64.764,145.477 73.461,145.477
"NetESC data out3_1": "ESC to motor.1" "motor 2.3" "motor 2.4" | length 29.8
  Top Layer w1.5: 56.819,141.1 58.092,139.827 59.362,139.827 ; 60.071,139.827 62.459,139.827 64.1,138.186
  Top Layer w2.5: 64.1,138.186 68.303,133.983 68.303,127.573 68.5,127.376 68.5,125.038 73.461,120.077
"NetESC data out3_2": "ESC to motor.2" "motor 2.1" "motor 2.2" | length 28.2
  Top Layer w1.5: 56.696,143.763 58.092,142.367 59.362,142.367 ; 60.071,142.367 61.341,142.367
  Top Layer w2.5: 61.341,142.367 63.813,142.367 71.057,135.124 71.057,128.714 73.461,126.31 73.461,125.157
"NetESC data out4_1": "ESC data out4.1" "motor 2.7" "motor 2.8" | length 34.3
  Top Layer w1.5: 56.662,136.177 58.092,134.747 59.362,134.747 ; 60.071,134.747 61.09,134.747 61.179,134.658
  Top Layer w2.5: 61.179,134.658 61.179,133.317 62.795,131.701 62.795,125.292 62.992,125.095 62.992,120.386 73.461,109.917
"NetESC data out4_2": "ESC data out4.2" "motor 2.5" "motor 2.6" | length 31.9
  Top Layer w1.5: 56.822,138.557 58.092,137.287 59.362,137.287 ; 60.071,137.287 61.738,137.287 63.933,135.092 63.933,134.458
  Top Layer w2.5: 63.933,134.458 65.549,132.842 65.549,126.433 65.746,126.235 65.746,122.712 73.461,114.997
"NetESC data out5_1": "ESC data out5.1" "Rjmotor 3.3" "Rjmotor 3.4" | length 37.2
  Bottom Layer w1.5: 56.898,121.919 58.168,120.649 59.438,120.649 59.691,120.396 62.611,120.396
  Bottom Layer w2.5: 62.611,120.396 62.696,120.396 65.419,117.673 74.984,117.673 78.619,121.308 78.619,124.012 80.083,125.476 87.503,125.476
"NetESC data out5_2": "ESC data out5.2" "Rjmotor 3.1" "Rjmotor 3.2" | length 36.9
  Bottom Layer w1.5: 56.898,124.459 58.168,123.189 59.438,123.189
  Bottom Layer w2.5: 59.438,123.189 72.029,123.189 72.465,122.753 74.457,122.753 75.865,124.161 75.865,128.189 78.232,130.556 87.503,130.556
"NetESC data out6_1": "ESC data out6.1" "Rjmotor 3.7" "Rjmotor 3.8" | length 39.1
  Bottom Layer w1.5: 56.898,116.839 58.168,115.569 59.438,115.569
  Bottom Layer w2.5: 59.438,115.569 67.494,107.513 74.984,107.513 78.619,111.148 78.619,113.519 80.416,115.316 87.503,115.316
"NetESC data out6_2": "ESC data out6.2" "Rjmotor 3.5" "Rjmotor 3.6" | length 37
  Bottom Layer w1.5: 56.898,119.379 58.168,118.109 59.438,118.109 59.724,117.823 60.372,117.823 61.736,116.459 62.738,116.459
  Bottom Layer w2.5: 62.738,116.459 66.604,112.593 74.457,112.593 75.865,114.001 75.865,114.659 81.602,120.396 87.503,120.396
"NetESC data out7_1": "ESC data out7.1" "Rjmotor 4.1" "Rjmotor 4.2" "Rjmotor 4.M1" "Rjmotor 4.Shell"@39.7,87.629 | length 81.6
  Bottom Layer w1.5: 27.76,92.329 29.03,91.059 30.3,91.059
  Bottom Layer w2.5: 30.3,91.059 32.998,91.059 34.187,89.87 36.569,89.87 36.65,89.789 ; 36.39,89.868 41.323,89.868 50.598,80.593 71.998,80.593 77.765,86.36 101.854,86.36
"NetESC data out7_2": "ESC data out7.2" "Rjmotor 4.3" "Rjmotor 4.4" "Rjmotor 6.Shell"@47.496,87.629 | length 82.2
  Bottom Layer w1.5: 27.76,94.869 29.03,93.599 30.3,93.599 30.586,93.313 35.139,93.313 35.33,93.122 37.91,93.122 38.41,92.622
  Bottom Layer w2.5: 38.41,92.622 42.503,92.622 47.496,87.629 ; 47.496,87.59 48.386,86.7 49.952,86.7 53.305,83.347 70.857,83.347 78.95,91.44 101.854,91.44
"NetESC data out8_1": "ESC data out8.1" "Rjmotor 4.5" "Rjmotor 4.6" "Rjmotor 6.M2" | length 85.7
  Bottom Layer w1.5: 27.76,97.409 29.03,96.139 30.3,96.139 31.063,95.376 36.263,95.376
  Bottom Layer w2.5: 36.263,95.376 48.134,95.376 50.765,92.745 50.765,90.482 50.674,90.391 50.674,89.842 50.855,89.661 51.436,89.661 54.996,86.101 61.49,86.101 62.257,86.868 65.632,86.868 76.164,97.4 93.477,97.4 94.357,96.52 101.854,96.52
"NetESC data out8_2": "ESC data out8.2" "Rjmotor 4.7" "Rjmotor 4.8" | length 85.9
  Bottom Layer w1.5: 27.76,99.949 29.03,98.679 30.3,98.679
  Bottom Layer w2.5: 30.3,98.679 34.821,98.679 35.37,98.13 49.952,98.13 54.692,93.39 54.692,91.416 57.253,88.855 60.349,88.855 61.116,89.622 64.491,89.622 77.349,102.48 100.974,102.48 101.854,101.6
"NetESC data out9_1": "ESC data out9.1" "Rjmotor 5.1" "Rjmotor 5.2" "Rjmotor 5.M1" | length 69.1
  Top Layer w1.5: 27.684,116.839 28.954,115.569 30.224,115.569
  Top Layer w2.5: 30.224,115.569 30.95,114.843 36.574,114.843 ; 36.574,114.608 36.755,114.427 36.884,114.427 37.299,114.843 40.899,114.843 50.639,105.103 61.14,105.103 64.516,101.727 65.236,101.727 68.458,98.505 83.994,98.505 87.503,94.996
"NetESC data out9_2": "ESC data out9.2" "Rjmotor 3.Shell"@47.498,112.139 "Rjmotor 5.3" "Rjmotor 5.4" | length 68.2
  Top Layer w1.5: 27.684,119.379 28.954,118.109 30.224,118.109 30.86,118.745 32.385,118.745
  Top Layer w2.5: 32.385,118.618 41.275,118.618 47.626,112.267 ; 47.626,112.139 48.339,112.139 52.621,107.857 62.577,107.857 65.659,104.775 66.082,104.775 69.598,101.259 86.32,101.259 87.503,100.076
"NetESC data out10_1": "ESC data out10.1" "Rjmotor 3.M2" "Rjmotor 5.5" "Rjmotor 5.6" | length 68.9
  Top Layer w1.5: 27.684,121.919 28.954,120.649 30.224,120.649 30.51,120.935 32.41,120.935 33.522,122.047
  Top Layer w2.5: 33.522,122.047 42.799,122.047 50.547,114.299 ; 50.548,114.299 50.676,114.171 52.555,114.171 56.114,110.611 64.141,110.611 70.739,104.013 86.36,104.013 87.503,105.156
"NetESC data out10_2": "ESC data out10.2" "Rjmotor 5.7" "Rjmotor 5.8" "Rjmotor 5.M2" | length 70.7
  Top Layer w1.5: 27.684,124.459 28.954,123.189 30.224,123.189
  Top Layer w2.5: 30.224,123.189 32.764,125.729 36.574,125.729 36.702,125.601 38.088,125.601 38.504,125.185 46.011,125.185 54.229,116.967 54.229,116.391 54.694,115.926 55.985,114.635 56.18,114.635 57.45,113.365 60.909,113.365 65.282,113.365 71.484,107.163 75.963,107.163 76.369,107.569 84.836,107.569 87.503,110.236
"NetESC data out11_1": "ESC data out11.1" "Rjmotor 6.3" "Rjmotor 6.4" | length 68.7
  Top Layer w1.5: 56.896,97.409 58.166,96.139 59.436,96.139 60.346,95.229 63.225,95.229
  Top Layer w2.5: 63.225,95.229 65.998,92.456 82.221,92.456 85.189,89.488 87.246,89.488 89.817,89.488 93.011,92.682 93.011,95.253 93.011,108.124 101.854,116.967
"NetESC data out11_2": "ESC data out11.2" "Rjmotor 6.1" "Rjmotor 6.2" | length 70.2
  Top Layer w1.5: 56.896,99.949 58.166,99.949 59.436,98.679
  Top Layer w2.5: 59.436,98.679 63.669,98.679 67.098,95.25 83.322,95.25 86.33,92.242 88.676,92.242 90.257,93.823 90.257,110.45 101.854,122.047
"NetESC data out12_1": "ESC data out12.1" "Rjmotor 6.7" "Rjmotor 6.8" | length 65.4
  Top Layer w1.5: 56.896,92.329 58.166,91.059 59.436,91.059
  Top Layer w2.5: 59.436,91.059 62.865,87.63 63.034,87.63 64.558,86.106 80.782,86.106 82.908,83.98 89.528,83.98 92.098,83.98 98.519,90.401 98.519,93.693 99.16,94.334 99.16,103.986 101.854,106.68
"NetESC data out12_2": "ESC data out12.2" "Rjmotor 6.5" "Rjmotor 6.6" | length 67
  Top Layer w1.5: 56.896,94.869 58.166,93.599 59.436,93.599 59.722,93.313 60.37,93.313 61.989,91.694 62.865,91.694
  Top Layer w2.5: 62.865,91.694 65.151,89.408 81.375,89.408 84.049,86.734 88.387,86.734 90.957,86.734 95.765,91.542 95.765,94.112 95.765,95.257 96.406,95.898 96.406,106.312 101.854,111.76
"NetMosfet rj6.1_1": "Mosfet rj6.1.1" rj6.1.2 | length 9.3
  Top Layer w0.254: 115.832,48.04 115.832,46.702 116.28,46.254 rj6.1.2@116.332,46.254
  Bottom Layer w0.254: v1(115.824,52.578) 117.971,50.431 117.971,47.356 v3(117.159,46.544)
"NetMosfet rj6.1_3": "Mosfet rj6.1.3" rj6.1.1 Rj6.7 Rj6.8 | length 12.9
  Top Layer w0.254: 116.332,49.049 116.332,49.242 ; Rj6.8@116.333,41.023 116.333,43.153 rj6.1.1@116.332,43.154 116.332,44.49 117.79,45.948 117.79,48.327 117.068,49.05 116.388,49.05 116.387,49.049
  Top Layer w0.5: Rj6.7@115.063,38.483 115.235,38.655 115.235,39.925 Rj6.8@116.333,41.023
"NetRj1 (pwr only)_1": "pwr only NO data.1"@112.905,75.945 "pwr only NO data.2"@115.445,74.675 | length 6.8
  Top Layer w1.5: 112.905,75.945 114.175,74.675 115.445,74.675 117.341,72.779 v1(118.402,72.779)
"NetRj1 (pwr only)_3": "pwr only NO data.3"@112.905,73.405 "pwr only NO data.4"@115.445,72.135 | length 6.7
  Top Layer w1.5: 112.905,73.405 114.175,72.135 115.445,72.135 117.185,70.395 v1(118.39,70.395)
"NetRj1 (pwr only)_5": "pwr only NO data.5"@112.905,70.865 "pwr only NO data.6"@115.445,69.595 | length 6.5
  Top Layer w1.5: 112.905,70.865 114.175,69.595 115.445,69.595 115.504,69.595 116.458,68.641 117.857,68.641 v1(118.304,68.195)
"NetRj1 (pwr only)_7": "pwr only NO data.7"@112.905,68.325 "pwr only NO data.8"@115.445,67.055 | length 6.4
  Top Layer w1.5: 112.905,68.325 112.964,68.325 113.448,67.841 114.659,67.841 115.445,67.055 115.564,67.055 115.732,66.887 116.79,66.887 v1(118.112,65.564)
"NetRj2 (Pwr only)_1": "pwr only NO data.1"@140.896,75.692 "pwr only NO data.2"@143.436,74.422 | length 6
  Top Layer w1.5: 140.896,75.692 142.166,75.692 143.436,74.422 146.177,74.422 v1(146.304,74.295)
"NetRj2 (Pwr only)_3": "pwr only NO data.3"@140.896,73.152 "pwr only NO data.4"@143.436,71.882 | length 5.9
  Top Layer w1.5: 140.896,73.152 142.166,73.152 143.436,71.882 v1(146.304,71.882)
"NetRj2 (Pwr only)_5": "pwr only NO data.5"@140.896,70.612 "pwr only NO data.6"@143.436,69.342 | length 5.9
  Top Layer w1.5: 140.896,70.612 142.166,70.612 143.436,69.342 145.923,69.342 v1(146.177,69.596)
"NetRj2 (Pwr only)_7": "pwr only NO data.7"@140.896,68.072 "pwr only NO data.8"@143.436,66.802 | length 6
  Top Layer w1.5: 140.896,68.072 142.166,68.072 143.436,66.802 145.796,66.802 v1(146.177,67.183)
"NetRj3 (pwr only)_1": 
"NetRj3 (pwr only)_3": 
"NetRj3 (pwr only)_5": 
"NetRj3 (pwr only)_7": 
pads on no net: "Arduino headers.17"@32.131,46.863 "Arduino headers.19"@32.131,49.403 "empty connector 1.1" "empty connector 1.2" "empty connector 2.1" "empty connector 2.2" "Fan header 1.3" "Fan header 1.4" "Fan header 2.3" "Fan header 2.4" "Interior headers.1" "Interior headers.3" "Interior headers.5" "Interior headers.7" "Interior headers.9" "Interior headers.11" "Interior headers.13" "Interior headers.15" "Interior headers.17" "Interior headers.19" "Pump header.3" "Pump header.4" "pwr only NO data.M1"@134.546,76.962 "pwr only NO data.M2" "pwr only NO data.Shell"@103.505,63.625 "pwr only NO data.Shell"@131.496,63.372 "pwr only NO data.Shell"@131.496,79.122 "Rjmotor 3.M1" "Rjmotor 3.Shell"@47.498,127.889 "Rjmotor 4.M2" "Rjmotor 4.Shell"@39.7,103.379 "Rjmotor 5.Shell" "Rjmotor 6.M1" "Rjmotor 6.Shell"@47.496,103.379 Rj4.M1 Rj4.M2 Rj4.Shell Rj5.M1 Rj5.M2 Rj5.Shell Rj6.M1 Rj6.M2 Rj6.Shell Rj7.M1 Rj7.M2 Rj7.Shell Rj8.M1 Rj8.M2 Rj8.Shell
copper on no net:
  other v2: 50.419,129.032 45.466,148.209
  other v6: 40.815,83.535 155.496,83.535 155.115,153.385

## Silkscreen, mask and mechanical layers (free items; w line width, h text height)
Top Overlay:
  text "Disable motors" at 144.78,155.702 h1.52 r180
  text "motor connectors" at 31.242,129.159 h1.52
  text "ESC PWR" at 146.431,120.777 h1.52 r90
  text "ESC PWR" at 124.841,118.364 h1.52 r90
  text "motor connectors" at 32.004,108.077 h1.52
  text "ESC to motor" at 94.234,104.521 h1.52 r90
  text "ESC to motor" at 108.331,98.425 h1.52 r90
  text "motor connectors" at 32.004,84.963 h1.52
  text "gnd" at 147.828,79.502 h1.52 r270
  text "3.3v" at 149.733,79.502 h1.25 r270
  text "5v" at 151.892,79.248 h1.25 r270
  text "12v" at 154.051,79.121 h1.25 r270
  text "gnd" at 119.253,77.978 h1.52 r270
  text "3.3v" at 121.158,77.978 h1.25 r270
  text "5v" at 123.317,77.724 h1.25 r270
  text "12v" at 125.476,77.597 h1.25 r270
  text "12v" at 140.843,60.706 h1.25
  text "12v" at 67.056,60.579 h1.25
  text "12v" at 104.902,60.452 h1.25
  text "12v" at 122.809,60.452 h1.25
  text "12v" at 85.852,60.198 h1.25
  text "5v" at 35.052,60.071 h1.25
  text "gnd" at 61.341,59.055 h1.52 r270
  text "5v" at 140.716,58.547 h1.25
  text "5v" at 66.929,58.42 h1.25
  text "5v" at 105.537,58.42 h1.25
  text "5v" at 123.952,58.42 h1.25
  text "5v" at 85.725,58.039 h1.25
  text "3.3v" at 122.174,56.388 h1.25
  text "3.3v" at 140.462,56.388 h1.25
  text "3.3v" at 66.675,56.261 h1.25
  text "3.3v" at 103.124,56.261 h1.25
  text "3.3v" at 85.471,55.88 h1.25
  text "gnd" at 140.462,54.483 h1.52
  text "gnd" at 66.675,54.356 h1.52
  text "gnd" at 103.378,54.102 h1.52
  text "gnd" at 85.471,53.975 h1.52
  text "gnd" at 122.301,53.975 h1.52
  text "3.3v" at 35.052,52.832 h1.25